# Altium PCB dc_cdi_cx500.PcbDoc (part 1 of 2)
Units mm, origin at the board's own origin, x right, y up, seen from the top; angles counter-clockwise.
Board outline 71.5 x 104.26 mm, 4 copper layers (Top, Power Plane, Ground Plane, Bottom), stack 1.586 mm thick; 134 components, 88 nets, 414 pads, 279 vias.
Unrouted connection lines stored in the file: 58.
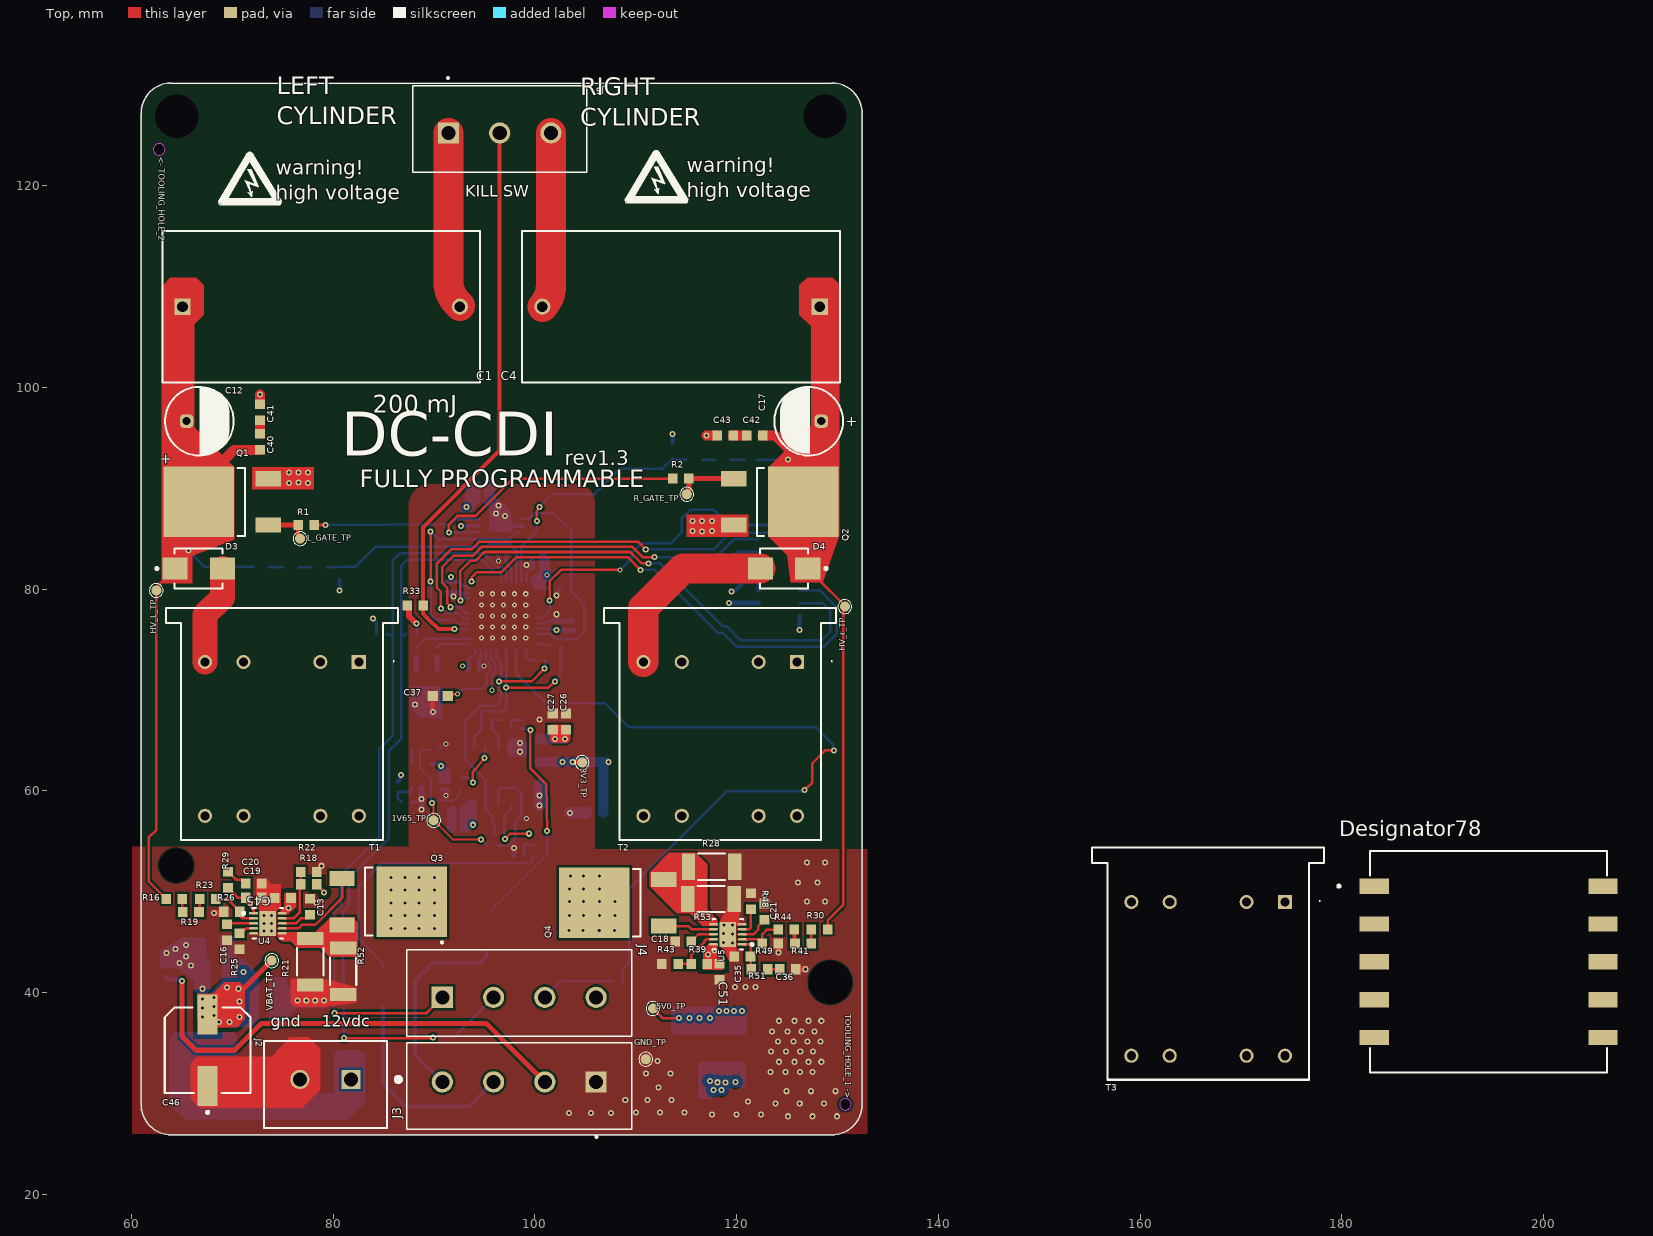
[diagram p0: Top view]
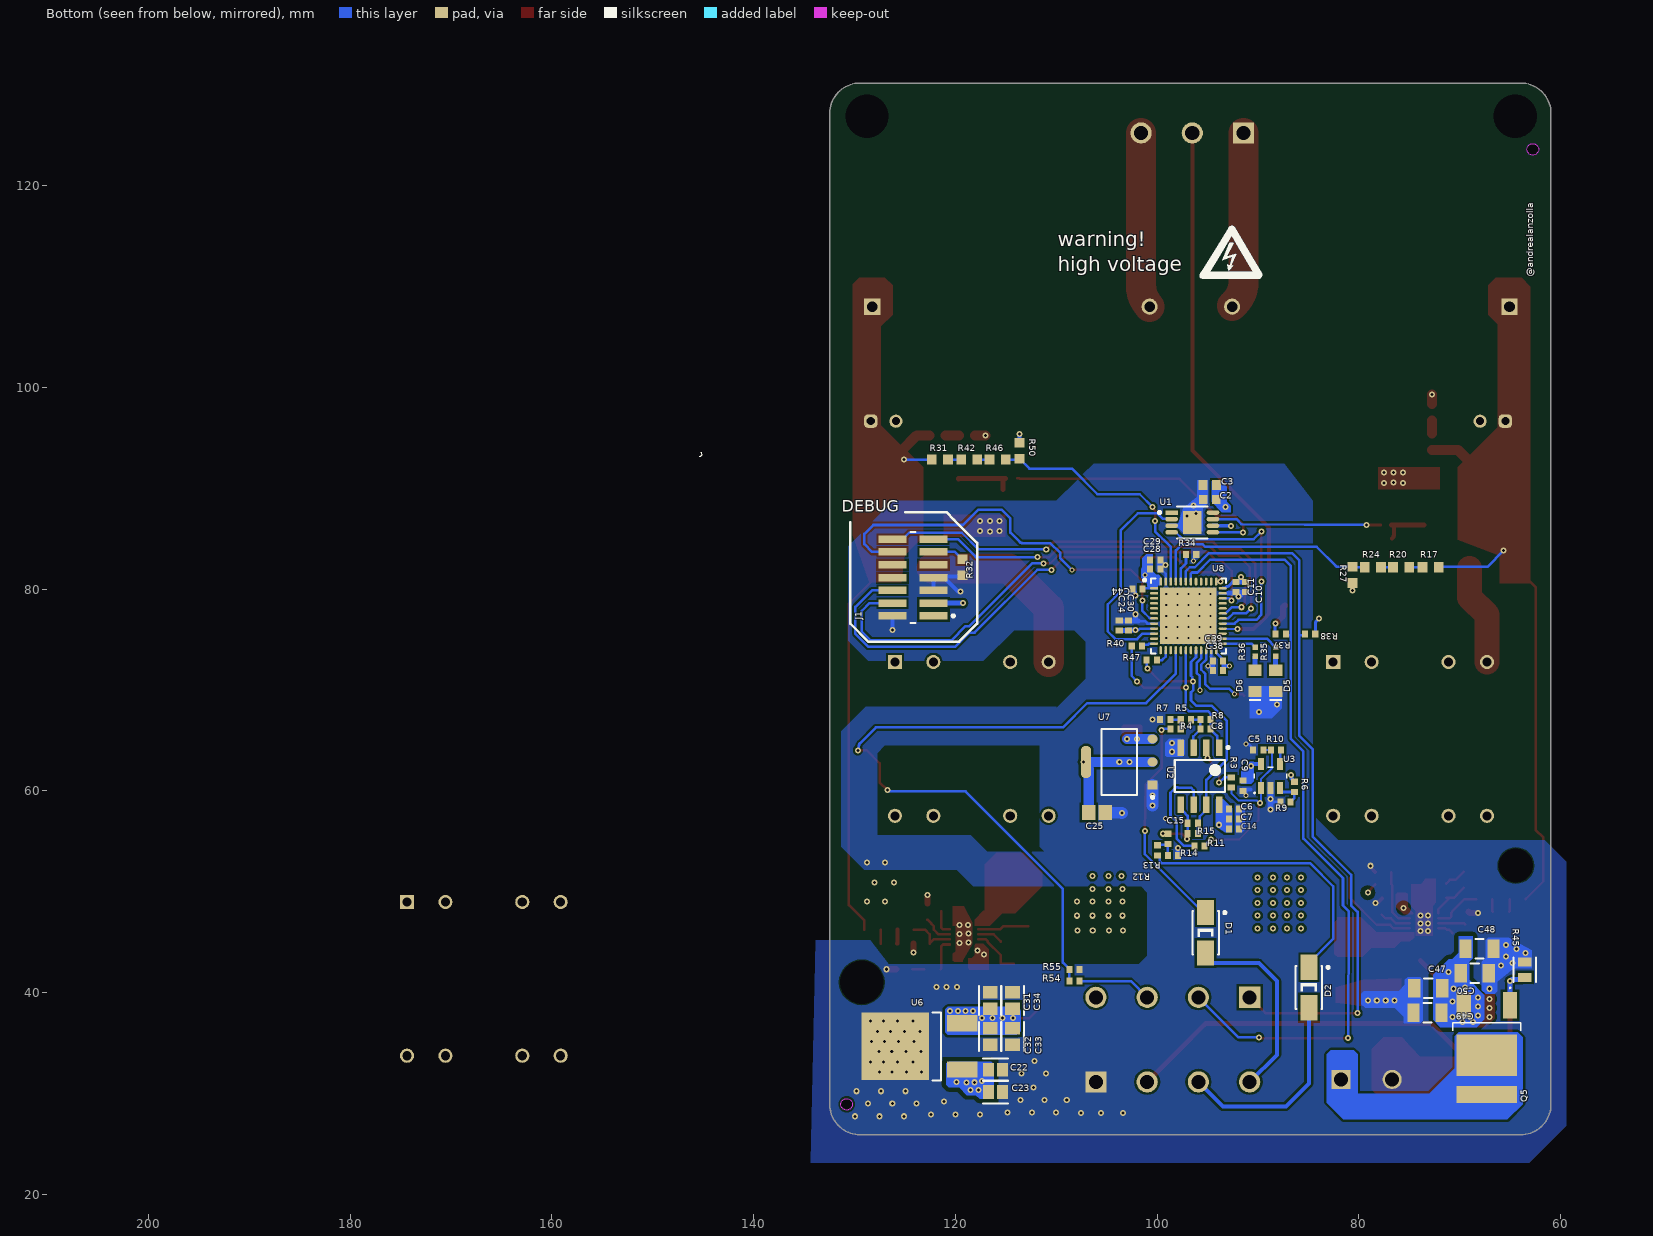
[diagram p1: Bottom view, seen from below]
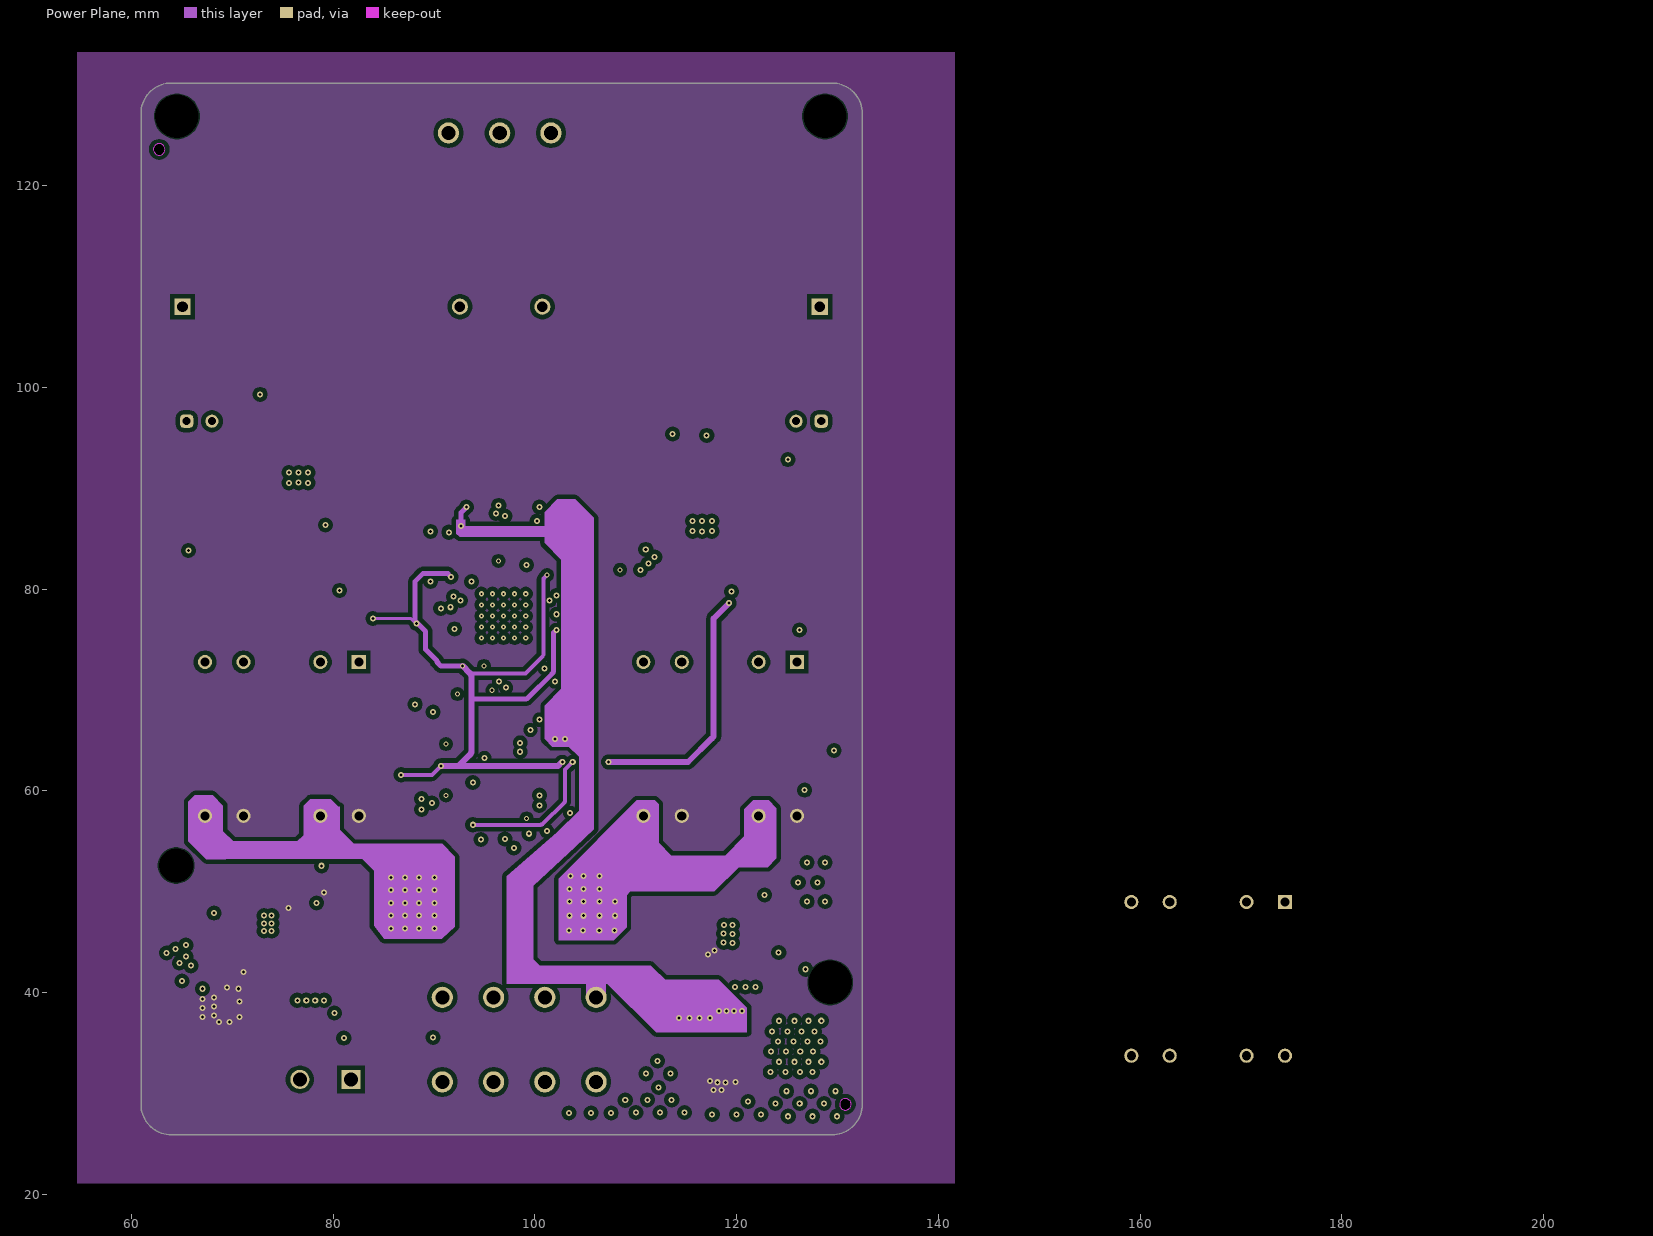
[diagram p2: Power Plane]
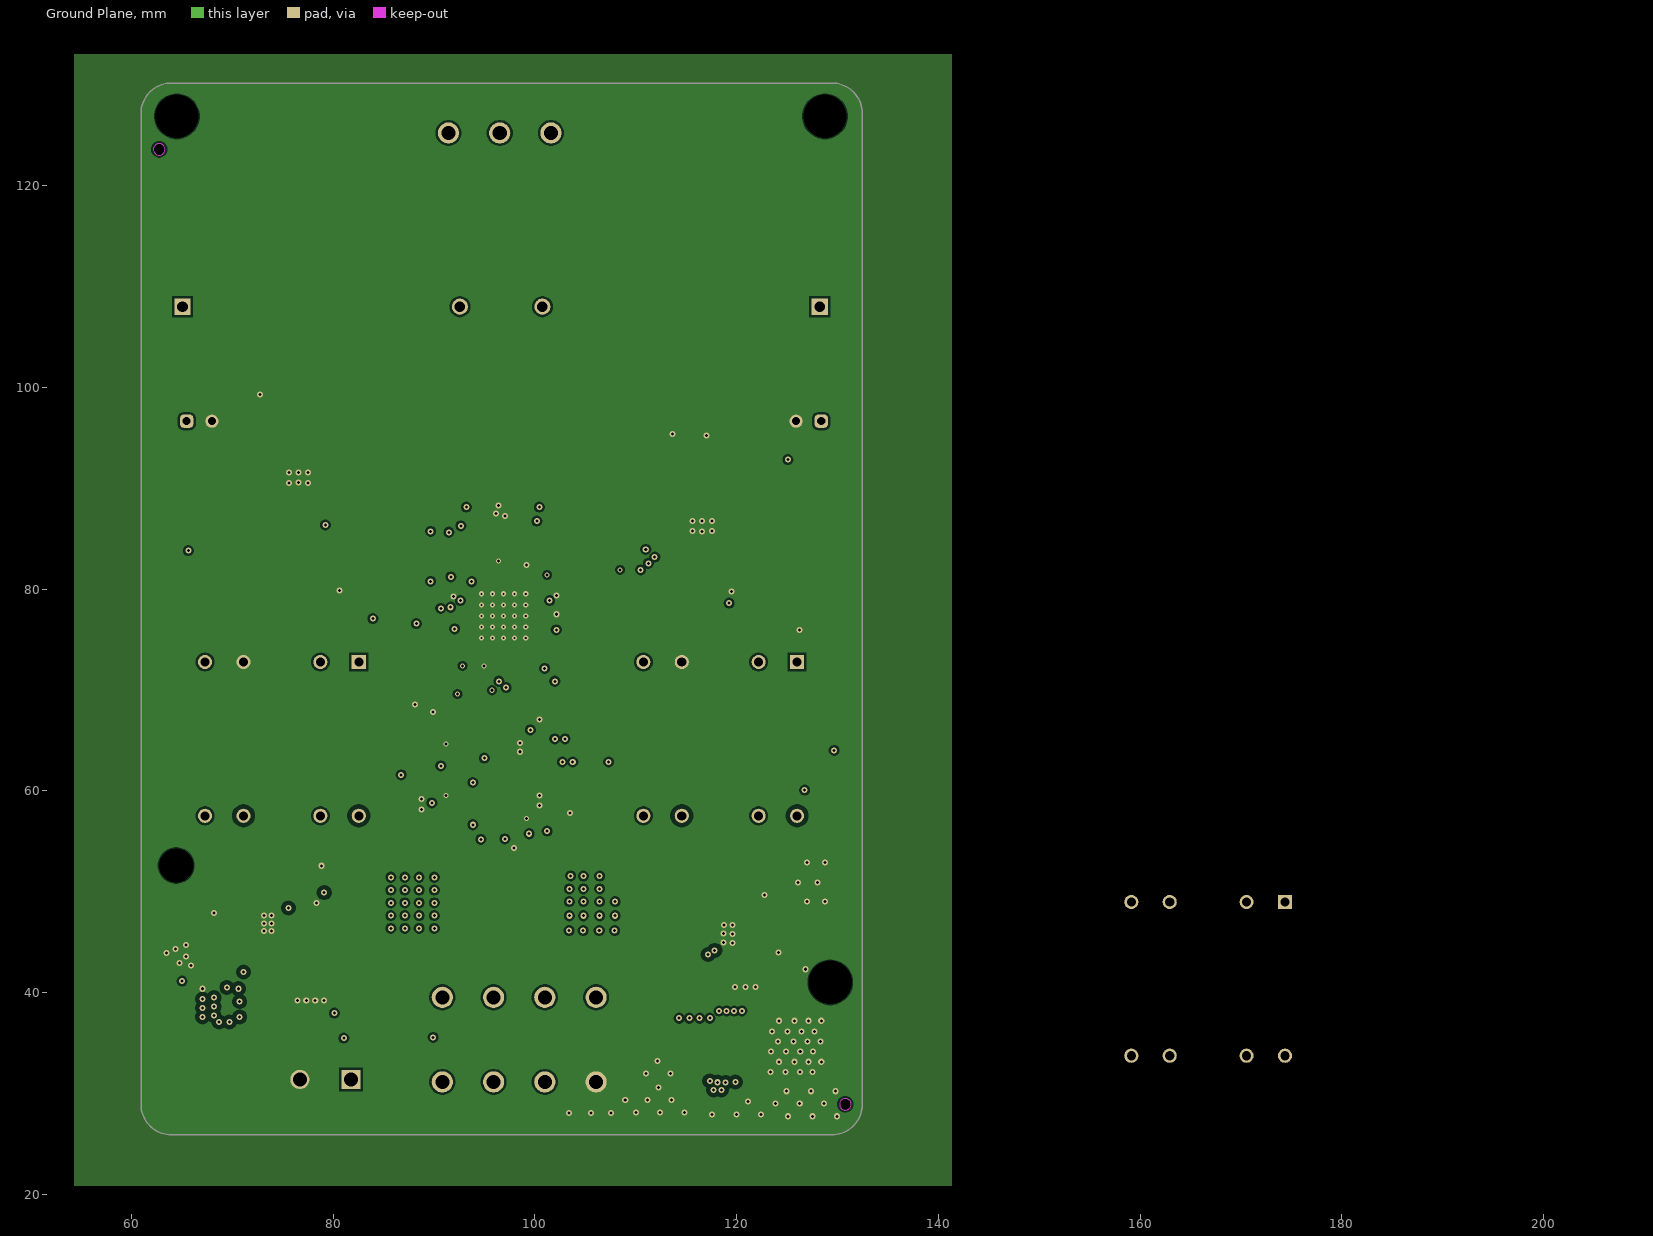
[diagram p3: Ground Plane]

## Layer stack, top to bottom
Top Solder: solder mask 0.0102, Solder Resist, Dk 3.5
Top: signal copper 0.035
Dielectric 2: prepreg 0.2104, PP-006, Dk 4.4
Power Plane: signal copper 0.0152
Dielectric 1: dielectric 1.065, FR-4, Dk 4.6
Ground Plane: signal copper 0.0152
Dielectric 3: prepreg 0.2104, PP-006, Dk 4.4
Bottom: signal copper 0.035
Bottom Solder: solder mask 0.0102, Solder Resist, Dk 3.5

## Board outline
60.96,28.908 60.96,127.17 cw(c63.96,127.17) 63.96,130.17 129.46,130.17 cw(c129.46,127.17) 132.46,127.17 132.46,28.908 cw(c129.46,28.908) 129.46,25.908 63.96,25.908 cw(c63.96,28.908)
cut-out: 63.34,123.597 ccw(c62.764,123.597) 62.764,124.173 ccw(c62.764,123.597) 62.188,123.597 ccw(c62.764,123.597) 62.764,123.021 ccw(c62.764,123.597)
cut-out: 130.208,28.93 ccw(c130.784,28.93) 130.784,28.354 ccw(c130.784,28.93) 131.36,28.93 ccw(c130.784,28.93) 130.784,29.506 ccw(c130.784,28.93)

## Design rules (kind name [scope] priority, off if disabled: settings)
AssemblyTestpoint [All] p1 off: testpointundercomponent=TRUE minsize=1.016 maxsize=2.54 preferedsize=1.524 minholesize=0 maxholesize=1.016 preferedholesize=0.813 testpointgrid=0.025 usegrid=TRUE gridtolerance=0 allowsidetop=TRUE allowsidebottom=TRUE
Clearance [Not (InNamedPolygon('VBAT_POUR') and InNamedPolygon('BOTTOM_GNDPLANE') and InNamedPolygon('TOP_GNDPLANE') and InNamedPolygon('GNDPLANE'))] p1: gap=0.1 ignorepadtopadclearanceinfootprint=FALSE except(0.15: Arc-Arc Arc-Track Track-Track)
Clearance Clearance_1 [InNamedPolygon('VBAT_POUR')] p2: gap=0.3 ignorepadtopadclearanceinfootprint=FALSE
Clearance Clearance_2 [InNamedPolygon('GNDPLANE')] p3: gap=0.3 ignorepadtopadclearanceinfootprint=FALSE
Clearance Clearance_3 [InNamedPolygon('TOP_GNDPLANE')] p4: gap=1 ignorepadtopadclearanceinfootprint=FALSE
Clearance Clearance_4 [InNamedPolygon('BOTTOM_GNDPLANE')] p5: gap=1 ignorepadtopadclearanceinfootprint=FALSE
ComponentClearance [All] p1: gap=0.1 collisioncheckmode=3 verticalgap=0.254 showdistances=FALSE
Creepage [InNet('VBAT')] p1: checkdistance=0.4 ignoreinternallayers=FALSE applytopolygonpour=TRUE
Creepage Creepage_1 [InNet('GND')] p2: checkdistance=0.2 ignoreinternallayers=FALSE applytopolygonpour=TRUE
FabricationTestpoint [All] p1 off: side=3 testpointundercomponent=TRUE minsize=1.016 maxsize=2.54 preferedsize=1.524 minholesize=0 maxholesize=1.016 preferedholesize=0.813 testpointgrid=0.025 allowsidetop=TRUE allowsidebottom=TRUE usegrid=TRUE gridtolerance=0
HoleToHoleClearance [All] p1 off: gap=0.254 allowstackedmicrovias=TRUE
NetAntennae [All] p1 off: netantennaetolerance=0
PlaneClearance [All] p1: clearance=0.2
PlaneConnect [All] p1: planeconnectstyle=Direct reliefexpansion=0.508 reliefentries=4 reliefconductorwidth=0.254 reliefairgap=0.254
PolygonConnect [All] p1: connectstyle=Direct reliefconductorwidth=0.254 reliefentries=4 polygonreliefangle="90 Angle" airgapwidth=0.254
RoutingVias [Not InNet('GND')] p1: holewidth=0.3 width=0.45 viastyle="Through Hole" minholewidth=0.3 minwidth=0.45 maxholewidth=0.5 maxwidth=1
RoutingVias RoutingVias_stitch_mcu [InNet('GND')] p2: holewidth=0.3 width=0.5 viastyle="Through Hole" minholewidth=0.2 minwidth=0.4 maxholewidth=0.5 maxwidth=1
SilkToSilkClearance [All] p1 off: silktosilkclearance=0.254
SilkToSolderMaskClearance [IsPad] p1 off: minsilkscreentomaskgap=0.254 clearancetoexposedcopper=TRUE
SolderMaskExpansion [All] p1: expansion=0.102 istentingtop=FALSE
SupplyNets "Schematic Supply Nets_1" [InNet('VBAT_0')] p1: voltage=0.000
SupplyNets "Schematic Supply Nets_5" [InNet('GND')] p2: voltage=0.000
SupplyNets "Schematic Supply Nets_4" [InNet('5V0')] p3: voltage=0.000
SupplyNets "Schematic Supply Nets_2" [InNet('1V65')] p4: voltage=0.000
SupplyNets "Schematic Supply Nets" [InNet('3V3')] p5: voltage=0.000
Width [All] p1: maxlimit=5 minlimit=0.1 preferedwidth=0.254
21 further rules are at their usual default settings.

## Classes and differential pairs
component class LV_power: C22 C23 C25 C26 C27 C31 C32 C33 C34 U6 U7
component class logic: C10 C11 C24 C28 C29 C30 C37 C38 C39 C44 D5 D6 R33 R34 R35 R36 R37 R38 R40 R47 R54 R55 U8
component class input_signal_conditioning: C5 C6 C7 C8 C9 C14 C15 D1 D2 R3 R4 R5 R6 R7 R8 R9 R10 R11 R12 R13 R14 R15 U2 U3
component class input_output: C46 C47 C48 C49 C50 J1 J2 J3 J4 J6 Q5 R32 R45
component class HV_power: C12 C13 C16 C17 C18 C19 C20 C21 C35 C36 C40 C41 C42 C43 C45 C51 D3 D4 Q3 Q4 R16 R17 R18 R19 R20 R21 R22 R23 R24 R25 R26 R27 R28 R29 R30 R31 R39 R41 R42 R43 R44 R46 R48 R49 R50 R51 R52 R53 T1 T2 U4 U5
component class cd_switching: C1 C2 C3 C4 Q1 Q2 R1 R2 U1

## Components (designator, comment, footprint, x,y, rotation, side; value= is the part's Value field where it differs from the comment)
C1 "BFC233820225" FP-BFC233820225-MFG 78.825,108 r0 top
C2 "06035C104KAT4A" CAPC1608X90X35LL15T15 94.784,88.893 r0 bottom value=100nF
C3 "C0603C475K8PACTU" CAPC1608X87X35NL15T15 94.784,90.322 r180 bottom value=100nF
C4 "BFC233820225" FP-BFC233820225-MFG 114.5,108 r180 top
C5 "Capacitor_0402" 0402_fp 89.982,64.072 r0 bottom value="100 nF"
C6 "Capacitor_0402" 0402_fp 92.39,58.199 r180 bottom value="100 nF"
C7 "Capacitor_0402" 0402_fp 92.387,57.199 r180 bottom value="100 nF"
C8 "Capacitor_0402" 0402_fp 95.208,66.143 r180 bottom value="3.3 nF"
C9 "Capacitor_0402" 0402_fp 91.513,60.515 r270 bottom value="100 nF"
C10 "Capacitor_0402" 0402_fp 91.265,80.214 r270 bottom value="10 nF"
C11 "Capacitor_0402" 0402_fp 92.188,80.214 r270 bottom value="10 nF"
C12 "860021373001" WCAP-ATG5_D6.3H11 66.741,96.65 r180 top
C13 "GRM21BR61C475KA88L" 0603_FP 77.724,48.514 r270 top value="4.7 uF"
C14 "Capacitor_0402" 0402_fp 92.387,56.223 r180 bottom value="100 nF"
C15 "Capacitor_0402" 0402_fp 96.467,56.793 r180 bottom value="3.3 nF"
C16 "Capacitor_0603" 0603_FP 69.469,45.974 r90 top value=".1 uF"
C17 "860021373001" WCAP-ATG5_D6.3H11 127.147,96.65 r0 top
C18 "Capacitor_0603" 0603_FP 114.706,45.059 r0 top value="4.7 uF"
C19 "Capacitor_0603" 0603_FP 72.136,49.403 r180 top value="100 pF"
C20 "Capacitor_0603" 0603_FP 72.136,50.8 r180 top value="10 nF"
C21 "Capacitor_0603" 0603_FP 122.782,48.035 r90 top value=".1 uF"
C22 "CC0805MKX5R8BB226" FP-CC0805-0_2-1_45-IPC_C 116.027,32.359 r180 bottom
C23 "CC0805MKX5R8BB226" FP-CC0805-0_2-1_45-IPC_C 116.027,30.155 r180 bottom
C24 "Capacitor_0402" 0402_fp 103.759,76.398 r90 bottom value="10 nF"
C25 "0805ZG106ZAT2A" CAPC2013X152X50NL20T25 105.956,57.861 r0 bottom
C26 "Capacitor_0603" 0603_FP 103.09,66.876 r90 top value="100 nF"
C27 "Capacitor_0603" 0603_FP 101.777,66.876 r90 top value="100 nF"
C28 "Capacitor_0402" 0402_fp 100.193,82.011 r180 bottom value="10 nF"
C29 "Capacitor_0402" 0402_fp 100.193,82.911 r180 bottom value="10 nF"
C30 "Capacitor_0402" 0402_fp 102.851,76.398 r90 bottom value="10 nF"
C31 "GRM21BR61A476ME15K" FP-GRM21B-0_2-e0_2_0_7-IPC_B 116.552,39.222 r90 bottom
C32 "GRM21BR61A476ME15K" FP-GRM21B-0_2-e0_2_0_7-IPC_B 116.552,35.656 r270 bottom
C33 "GRM21BR61A476ME15K" FP-GRM21B-0_2-e0_2_0_7-IPC_B 114.342,35.656 r270 bottom
C34 "GRM21BR61A476ME15K" FP-GRM21B-0_2-e0_2_0_7-IPC_B 114.342,39.222 r90 bottom
C35 "Capacitor_0603" 0603_FP 120.585,43.578 r180 top value="100 pF"
C36 "Capacitor_0603" 0603_FP 125.068,42.32 r0 top value="10 nF"
C37 "0603ZD475MAT2A" CAPC1608X90X35NL15T15 90.628,69.42 r180 top
C38 "Capacitor_0402" 0402_fp 93.981,71.929 r0 bottom value="10 nF"
C39 "Capacitor_0402" 0402_fp 93.981,72.864 r0 bottom value="10 nF"
C40 "Capacitor_0603" 0603_FP 72.771,94.615 r90 top value="470 nF"
C41 "Capacitor_0603" 0603_FP 72.771,97.536 r90 top value="470 nF"
C42 "Capacitor_0603" 0603_FP 121.793,95.25 r180 top value="470 nF"
C43 "Capacitor_0603" 0603_FP 118.872,95.25 r180 top value="470 nF"
C44 "Capacitor_0402" 0402_fp 101.959,79.998 r0 bottom value="100 nF"
C45 "GRM21BR61C475KA88L" 0603_FP 75.028,49.368 r180 top value=".22 uF"
C46 "EEEFT1E471AP" FP-FTF-MFG 67.564,34.29 r90 top
C47 "C1206X104J3GACTU" FP-C1206X104J3GACTU-MFG 68.524,41.928 r180 bottom
C48 "C1206X104J3GACTU" FP-C1206X104J3GACTU-MFG 68.043,44.342 r180 bottom
C49 "C1206X104J3GACTU" FP-C1206X104J3GACTU-MFG 73.203,38.012 r0 bottom
C50 "C1206X104J3GACTU" FP-C1206X104J3GACTU-MFG 73.127,40.426 r0 bottom
C51 "GRM21BR61C475KA88L" 0603_FP 118.297,42.066 r270 top value=".22 uF"
D1 "S1M-13-F" DIOD-S1M-13-F-SMA-2_V 95.196,45.934 r90 bottom
D2 "S1M-13-F" DIOD-S1M-13-F-SMA-2_V 84.963,40.513 r90 bottom
D3 "S3JB" FP-403AF-MFG 66.675,82.042 r0 top
D4 "S3JB" FP-403AF-MFG 124.715,82.042 r180 top
D5 "150080RS75000" WL-SMCW_0805_150080xx75000 88.243,70.914 r90 bottom
D6 "150080GS75000" WL-SMCW_0805_150080xx75000 90.297,70.914 r90 bottom
Designator78 "Comment" "WE-FB 3751_EFD20" 194.564,43.053 r0 top
J1 "FTSH-107-01-F-DV-K" FP-FTSH-107-01-F-DV-K-MFG 124.206,81.153 r90 bottom
J2 "1755736" PHOE-1755736-2_V 79.248,31.392 r180 top
J3 "1755752" PHOENIX_1755752 109.611,35.017 r180 top
J4 "1755752" PHOENIX_1755752 87.291,35.667 r0 top
J6 "1755749" PHOENIX_1755749 87.9,121.352 r0 top
Q1 "IPB200N25N3" FP-PG-TO252-3-MFG 69,88.646 r90 top
Q2 "IPB200N25N3" FP-PG-TO252-3-MFG 124.294,88.646 r270 top
Q3 "IPD50R280CE" FP-PG-TO252-3-MFG 85.471,49.022 r270 top
Q4 "IPD50R280CE" FP-PG-TO252-3-MFG 108.201,48.909 r90 top
Q5 "MJD3055T4G" PRSS0004ZG-A_MFG 67.31,34.544 r0 bottom
R1 "Resistor_0603" 0603_FP 77.343,86.36 r0 top value="47 Ohm"
R2 "Resistor_0603" 0603_FP 114.468,90.984 r0 top value="47 Ohm"
R3 "Resistor_0402" 0402_fp 92.656,60.833 r270 bottom value="100 Ω"
R4 "Resistor_0402" 0402_fp 98.171,66.143 r0 bottom value="47 kΩ"
R5 "Resistor_0402" 0402_fp 97.155,67.056 r0 bottom value="10 kΩ"
R6 "Resistor_0402" 0402_fp 86.395,60.401 r270 bottom value="10 kΩ"
R7 "Resistor_0402" 0402_fp 99.196,67.061 r180 bottom value="8.2 kΩ"
R8 "Resistor_0402" 0402_fp 95.208,67.069 r0 bottom value="100 kΩ"
R9 "Resistor_0402" 0402_fp 87.285,58.889 r0 bottom value="10 kΩ"
R10 "Resistor_0402" 0402_fp 88.229,64.047 r180 bottom value="10 kΩ"
R11 "Resistor_0402" 0402_fp 95.807,54.558 r180 bottom value="100 Ω"
R12 "Resistor_0402" 0402_fp 99.949,54.102 r270 bottom value="47 kΩ"
R13 "Resistor_0402" 0402_fp 98.933,55.245 r270 bottom value="10 kΩ"
R14 "Resistor_0402" 0402_fp 98.425,53.594 r0 bottom value="8.2 kΩ"
R15 "Resistor_0402" 0402_fp 96.467,55.766 r0 bottom value="100 kΩ"
R16 "Resistor_0603" 0603_FP 64.262,49.276 r180 top value="50 kOhm"
R17 "Resistor_0603" 0603_FP 72.898,82.169 r180 bottom value="100 kOhm"
R18 "Resistor_0603" 0603_FP 77.597,50.743 r0 top value="470 kOhm"
R19 "Resistor_0603" 0603_FP 65.913,48.006 r180 top value="50 kOhm"
R20 "Resistor_0603" 0603_FP 75.819,82.169 r180 bottom value="100 kOhm"
R21 "CSRN2010FK20L0" FP-CSRN2010-IPC_B 77.728,43.058 r90 top
R22 "Resistor_0603" 0603_FP 77.597,51.943 r180 top value="56 kOhm"
R23 "Resistor_0603" 0603_FP 67.564,49.276 r180 top value="24 kOhm"
R24 "Resistor_0603" 0603_FP 78.613,82.169 r180 bottom value="165 kOhm"
R25 "Resistor_0603" 0603_FP 70.74,45.093 r90 top value="100 kOhm"
R26 "Resistor_0603" 0603_FP 69.956,48.02 r0 top value="1 kOhm"
R27 "Resistor_0603" 0603_FP 80.645,81.407 r90 bottom value="5.6 kOhm"
R28 "CSRN2010FK20L0" FP-CSRN2010-IPC_B 117.525,52.49 r180 top
R29 "Resistor_0603" 0603_FP 69.596,51.181 r270 top value="10 kOhm"
R30 "Resistor_0603" 0603_FP 128.223,46.257 r0 top value="50 kOhm"
R31 "Resistor_0603" 0603_FP 121.539,92.837 r0 bottom value="100 kOhm"
R32 "Resistor_0603" 0603_FP 119.316,82.183 r270 bottom value="10 kOhm"
R33 "Resistor_0603" 0603_FP 88.155,78.391 r180 top value="10 kOhm"
R34 "Resistor_0402" 0402_fp 96.633,83.427 r180 bottom value="10 kΩ"
R35 "MCS04020D5600BE100" RESC1005X37X20NL05T10 88.265,73.787 r270 bottom
R36 "MCS04020D5600BE100" RESC1005X37X20NL05T10 90.297,73.787 r270 bottom
R37 "Resistor_0402" 0402_fp 87.757,75.565 r180 bottom value="4.7 kΩ"
R38 "Resistor_0402" 0402_fp 84.836,75.565 r0 bottom value="4.7 kΩ"
R39 "Resistor_0603" 0603_FP 116.309,42.841 r180 top value="470 kΩ"
R40 "Resistor_0402" 0402_fp 102.013,74.376 r180 bottom value="0 Ω"
R41 "Resistor_0603" 0603_FP 126.592,44.86 r0 top value="50 kOhm"
R42 "Resistor_0603" 0603_FP 118.618,92.837 r0 bottom value="100 kOhm"
R43 "Resistor_0603" 0603_FP 113.402,42.852 r180 top value="56 kΩ"
R44 "Resistor_0603" 0603_FP 124.938,46.257 r0 top value="24 kOhm"
R45 "CRGP0805F10K" FP-CRGP0805-IPC_C 63.562,42.277 r270 bottom value=10KΩ
R46 "Resistor_0603" 0603_FP 115.824,92.837 r0 bottom value="165 kOhm"
R47 "Resistor_0402" 0402_fp 100.545,72.964 r180 bottom value="0 Ω"
R48 "Resistor_0603" 0603_FP 121.451,49.053 r90 top value="100 kΩ"
R49 "Resistor_0603" 0603_FP 123.346,44.866 r180 top value="1 kOhm"
R50 "Resistor_0603" 0603_FP 113.665,93.726 r270 bottom value="5.6 kOhm"
R51 "Resistor_0603" 0603_FP 122.274,42.32 r0 top value="10 kΩ"
R52 "CSRN2010FK20L0" FP-CSRN2010-IPC_B 80.995,42.119 r90 top
R53 "CSRN2010FK20L0" FP-CSRN2010-IPC_B 117.465,49.282 r180 top
R54 "Resistor_0402" 0402_fp 108.204,41.148 r0 bottom value="20 kΩ"
R55 "Resistor_0402" 0402_fp 108.204,42.291 r0 bottom value="39 kΩ"
T1 "74080" 74080 82.55,72.771 r270 top
T2 "74080" 74080 126,72.771 r270 top
T3 "74080" 74080 174.372,48.985 r270 top (schematic designator T2)
U1 "ADP3654ARHZ-RL" FP-RH-8-1-IPC_C 96.52,86.614 r180 bottom
U2 "LM358MX" D0008A_M 95.758,61.468 r270 bottom
U3 "ISL28134FHZ-T7A" P5_064A_MFG 88.773,61.468 r90 bottom
U4 "LT3758EDD#PBF" FP-DD-10-05-08-1699-IPC_B 73.537,46.868 r0 top
U5 "LT3758EDD#PBF" FP-DD-10-05-08-1699-IPC_B 119.134,45.778 r180 top
U6 "L78M05ABDT-TR" FP-L78M05ABDT-TR-MFG 124.526,34.671 r90 bottom
U7 "AMS1117-3.3" FP-AMS1117-IPC_C 103.759,62.865 r0 bottom
U8 "STM32F411CEU6" STM-UFQFPN48_L 96.901,77.343 r180 bottom

## Footprints (in the part's own frame and the unit in brackets; to place one, negate y for a bottom-side part, rotate by r counter-clockwise, add the part's x,y. Pads: shape width x height; smd on the part's side, far side on the other; paste and mask are expansions set on the pad)
0402_fp [mm]
  rect 0.6x0.7 smd mask+0.05: 1(-0.508,0) 2(0.508,0)
0603_FP [mm]
  rect 0.95x1 smd mask+0.05: 1(-0.8,0) 2(0.8,0)
74080 [mm]
  rect 1.4x1.4 hole 0.9: 1(0,0)
  round 1.4 hole 0.9: 2(0,-3.81) 4(0,-11.43) 5(0,-15.24) 6(15.24,-15.24) 7(15.24,-11.43) 9(15.24,-3.81) 10(15.24,0)
  silkscreen extent -5.38,-19.12 17.62,3.88, body extent -5.38,-19.12 17.62,3.88, height 18.1
CAPC1608X87X35NL15T15 [mm] "Chip Capacitor, 2-Leads, Body 1.60x0.80mm, IPC Medium Density"
  rect 0.9x1 smd: 1(-0.675,0) 2(0.675,0)
  body extent -0.87,-0.48 0.87,0.47, height 0.87
CAPC1608X90X35LL15T15 [mm] "Chip Capacitor, 2-Leads, Body 1.60x0.81mm, IPC High Density"
  rect 0.85x0.9 smd: 1(-0.65,0) 2(0.65,0)
  body extent -0.88,-0.48 0.87,0.48, height 0.9
CAPC1608X90X35NL15T15 [mm] "Chip Capacitor, 2-Leads, Body 1.60x0.81mm, IPC Medium Density"
  rect 1.05x1 smd: 1(-0.75,0) 2(0.75,0)
  body extent -0.88,-0.48 0.87,0.48, height 0.9
CAPC2013X152X50NL20T25 [mm] "Chip Capacitor, 2-Leads, Body 2.01x1.25mm, IPC Medium Density"
  rect 1.35x1.45 smd: 1(-0.825,0) 2(0.825,0)
  body extent -1.1,-0.72 1.11,0.72, height 1.52
D0008A_M [mm] "SOIC, 8-Leads, Body 5x4mm, Pitch 1.27mm, IPC Low Density"
  rrect15% 1.65x0.65 smd: 1(-2.825,1.905) 2(-2.825,0.635) 3(-2.825,-0.635) 4(-2.825,-1.905) 5(2.825,-1.905) 6(2.825,-0.635) 7(2.825,0.635) 8(2.825,1.905)
  silkscreen extent -2.95,-2.5 1.6,2.9, body extent -3,-2.45 3,2.45, height 1.63
DIOD-S1M-13-F-SMA-2_V [mm] "SMD, 2-Leads, Body 4.3x2.605mm, Height 2.3mm"
  rect 2.5x1.7 smd: 1(-2,0) 2(2,0)
  silkscreen extent -2.15,-2.03 2.15,1.3, body extent -2.15,-1.3 2.15,1.3, height 2.3
FP-403AF-MFG [mm]
  rect 2.5x2.2 smd paste+0 mask+0: 1(-2.35,0) 2(2.35,0)
  silkscreen extent -4.27,-1.98 2.38,1.98, body extent -3.7,-2.07 3.7,2.07, height 0.25
FP-AMS1117-IPC_C [mm]
  rect 1.004x0.872 smd paste+0 mask+0: 1(-3.295,2.29)
  rrect100% 1.004x0.872 smd paste+0 mask+0: 2(-3.295,0) 3(-3.295,-2.29)
  rrect87% 1.004x3.182 smd paste+0 mask+0: 4(3.295,0)
  silkscreen extent -3.42,-3.25 1.75,3.62, body extent -3.53,-3.25 3.53,3.25, height 1.8
FP-BFC233820225-MFG [mm]
  rect 1.6x1.6 hole 1.05 paste-2539.97 mask+0: 1(-13.75,0)
  round 1.6 hole 1.05 paste-2539.97 mask+0: 2(13.75,0)
  silkscreen extent -15.75,-7.5 15.75,7.5, body extent -15.85,-7.6 15.85,7.6, height 0.25
FP-C1206X104J3GACTU-MFG [mm]
  rect 1.22x1.86 smd paste+0 mask+0: 1(-1.39,0) 2(1.39,0)
  silkscreen extent -0.4,-0.98 0.41,0.97, body extent -1.65,-0.8 1.65,0.8, height 1.8
FP-CC0805-0_2-1_45-IPC_C [mm]
  rect 1.105x1.356 smd paste+0 mask+0: 1(-0.701,0) 2(0.701,0)
  silkscreen extent -1.25,-1.13 1.25,1.13, body extent -1,-0.63 1,0.63, height 1.45
FP-CRGP0805-IPC_C [mm]
  rect 0.906x1.31 smd paste+0 mask+0: 1(-0.776,0) 2(0.776,0)
  silkscreen extent -1.23,-1.1 1.23,1.1, body extent -1,-0.63 1,0.63, height 0.65
FP-CSRN2010-IPC_B [mm]
  rect 1.305x2.608 smd paste+0 mask+0: 1(-2.301,0) 2(2.301,0)
  silkscreen extent -1.35,-1.3 1.35,1.3, body extent -3.2,-1.55 3.2,1.55, height 0.25
FP-DD-10-05-08-1699-IPC_B [mm]
  rect 0.881x0.242 smd paste+0 mask+0: 1(-1.416,1)
  rrect100% 0.881x0.242 smd paste+0 mask+0: 2(-1.416,0.5) 3(-1.416,0) 4(-1.416,-0.5) 5(-1.416,-1) 6(1.416,-1) 7(1.416,-0.5) 8(1.416,0) 9(1.416,0.5) 10(1.416,1)
  rect 1.65x2.48 smd paste-1000 mask+0: 11(0,0)
  silkscreen extent -2.53,-1.5 1.5,1.5, body extent -2.11,-1.75 2.11,1.75, height 0.25
FP-FTF-MFG [mm]
  rect 4x2 smd paste+0 mask+0: 1(-3.55,0) 2(3.55,0)
  silkscreen extent -6.27,-4.25 4.25,4.25, body extent -5.8,-4.5 5.8,4.5, height 0.25
FP-FTSH-107-01-F-DV-K-MFG [mm]
  rect 0.74x2.79 smd paste+0 mask+0: 1(-3.81,-2.035) 2(-3.81,2.035) 3(-2.54,-2.035) 4(-2.54,2.035) 5(-1.27,-2.035) 6(-1.27,2.035) 7(0,-2.035) 8(0,2.035) 9(1.27,-2.035) 10(1.27,2.035) 11(2.54,-2.035) 12(2.54,2.035) 13(3.81,-2.035) 14(3.81,2.035)
  silkscreen extent -4.51,-4.11 4.51,0.27, body extent -4.44,-2.92 4.44,2.92, height 6.38
FP-GRM21B-0_2-e0_2_0_7-IPC_B [mm]
  rect 1.255x1.456 smd paste+0 mask+0: 1(-0.826,0) 2(0.826,0)
  silkscreen extent -1.45,-1.13 1.45,1.13, body extent -1,-0.63 1,0.63, height 1.45
FP-L78M05ABDT-TR-MFG [mm]
  rect 1.6x3 smd paste+0 mask+0: 1(-2.3,-5.193) 3(2.3,-5.193)
  rect 6.7x6.7 smd paste+0 mask+0: 4(0,1.458)
  silkscreen extent -3.36,-3.11 3.36,-2.27, body extent -3.1,-3.3 3.1,3.3, height 2.4
FP-PG-TO252-3-MFG [mm]
  rect 1.5x2.5 smd paste+0 mask+0: 1(-2.3,-4.575) 3(2.3,-4.575)
  rect 7x7 smd paste+0 mask+0: 4(0,2.325)
  silkscreen extent -3.36,-2.28 3.36,-1.55, body extent -3.6,-5.92 3.6,5.92, height 0.25
FP-RH-8-1-IPC_C [mm]
  rect 1.257x0.436 smd paste+0 mask+0: 1(-2.051,0.975)
  rrect100% 1.257x0.436 smd paste+0 mask+0: 2(-2.051,0.325) 3(-2.051,-0.325) 4(-2.051,-0.975) 5(2.051,-0.975) 6(2.051,-0.325) 7(2.051,0.325) 8(2.051,0.975)
  rect 1.83x2.26 smd paste-1000 mask+0: 9(0,0)
  silkscreen extent -3.38,-1.6 1.5,1.6, body extent -2.46,-1.5 2.46,1.5, height 1.1
P5_064A_MFG [mm] "Recommended Land Pattern"
  rect 1.2x0.6 smd paste+0 mask+0: 1(-1.2,0.95) 2(-1.2,0) 3(-1.2,-0.95) 4(1.2,-0.95) 5(1.2,0.95)
  silkscreen extent -1.74,-1.6 0.87,1.64, body extent -1.4,-1.45 1.4,1.45, height 1.45
PHOE-1755736-2_V [mm] "THD, 2-Leads, Body 12.16x8.6mm, Pitch 5.08mm"
  rect 1.9x1.9 hole 1.4: 1(-2.54,0)
  round 1.9 hole 1.4: 2(2.54,0)
  silkscreen extent -7.42,-3.8 6.08,4.8, body extent -6.08,-3.8 6.08,4.8, height 12
PHOENIX_1755749 [mm]
  rect 2.1x2.1 / inner round 2.1 / far side rect 2.1x2.1 hole 1.4: 1(3.54,3.87)
  round 2.1 hole 1.4: 2(8.62,3.87) 3(13.7,3.87)
  silkscreen extent 0,0 17.24,9.42, body extent 0.02,0 17.26,8.57, height 12.15
PHOENIX_1755752 [mm]
  rect 2.1x2.1 / inner round 2.1 / far side rect 2.1x2.1 hole 1.4: 1(3.54,3.87)
  round 2.1 hole 1.4: 2(8.62,3.87) 3(13.7,3.87) 4(18.78,3.87)
  silkscreen extent 0,0 22.32,9.42, body extent 0.03,0 22.35,8.57, height 12.15
PRSS0004ZG-A_MFG [mm] "Recommended Land Pattern"
  rect 1.4x2.6 smd paste+0 mask+0: 1(-2.3,-4.2) 3(2.3,-4.2)
  rect 6x4.1 smd paste+0 mask+0: 4(0,0.75)
  rect 6x1.7 smd paste+0 mask+0: 4(0,4.65)
  silkscreen extent -3.37,-5.99 3.37,-1.67, body extent -3.3,-5.2 3.3,5.2, height 2.5
RESC1005X37X20NL05T10 [mm] "Chip Resistor, 2-Leads, Body 1.00x0.50mm, IPC Medium Density"
  rect 0.55x0.55 smd: 1(-0.45,0) 2(0.45,0)
  body extent -0.53,-0.27 0.53,0.28, height 0.37
STM-UFQFPN48_L [mm] "QFN, 48-Leads, Body 7.1x7.1mm, Pitch 0.5mm, Thermal Pad 5.6x5.6mm, IPC High Density"
  oval 0.8x0.25 smd: 1(-3.4,2.75) 2(-3.4,2.25) 3(-3.4,1.75) 4(-3.4,1.25) 5(-3.4,0.75) 6(-3.4,0.25) 7(-3.4,-0.25) 8(-3.4,-0.75) 9(-3.4,-1.25) 10(-3.4,-1.75) 11(-3.4,-2.25) 12(-3.4,-2.75) 25(3.4,-2.75) 26(3.4,-2.25) 27(3.4,-1.75) 28(3.4,-1.25) 29(3.4,-0.75) 30(3.4,-0.25) 31(3.4,0.25) 32(3.4,0.75) 33(3.4,1.25) 34(3.4,1.75) 35(3.4,2.25) 36(3.4,2.75)
  oval 0.25x0.8 smd: 13(-2.75,-3.4) 14(-2.25,-3.4) 15(-1.75,-3.4) 16(-1.25,-3.4) 17(-0.75,-3.4) 18(-0.25,-3.4) 19(0.25,-3.4) 20(0.75,-3.4) 21(1.25,-3.4) 22(1.75,-3.4) 23(2.25,-3.4) 24(2.75,-3.4) 37(2.75,3.4) 38(2.25,3.4) 39(1.75,3.4) 40(1.25,3.4) 41(0.75,3.4) 42(0.25,3.4) 43(-0.25,3.4) 44(-0.75,3.4) 45(-1.25,3.4) 46(-1.75,3.4) 47(-2.25,3.4) 48(-2.75,3.4)
  rect 5.6x5.6 smd: 49(0,0)
  silkscreen extent -4.48,-3.7 3.7,3.7, body extent -3.55,-3.55 3.55,3.55, height 0.6
WCAP-ATG5_D6.3H11 [mm] "Aluminum Electrolytic Capacitors, 6.3x11mm"
  rrect50% 1.3x1.3 hole 0.8: 1(1.25,0)
  round 1.3 hole 0.8: 2(-1.25,0)
  silkscreen extent -3.4,-3.4 3.4,3.4, body extent -3.14,-3.15 3.15,3.15, height 11.31
"WE-FB 3751_EFD20" [mm] "Flyback Transformer for LT3751, size EE35/18/10"
  rect 2.92x1.52 smd: 1(-11.33,7.5) 2(-11.33,3.75) 3(-11.33,0) 4(-11.33,-3.75) 5(-11.33,-7.5) 6(11.33,-7.5) 7(11.33,-3.75) 8(11.33,0) 9(11.33,3.75) 10(11.33,7.5)
  silkscreen extent -14.97,-10.98 11.75,10.98, body extent -13.75,-10.75 13.75,10.75, height 10.23
WL-SMCW_0805_150080xx75000 [mm] "SMD Mono-color Chip LED, body 2.0x1.25mm"
  rect 1.1x1.3 smd: 1(-1.05,0) 2(1.05,0)
  silkscreen extent -2,-0.6 -1.8,0.6, body extent -1,-0.63 1,0.62, height 0.7

## Part data
C1 C4: library part CMP-00030-39758189-1, "BFC233820225 Film Capacitor, Polypropylene, 800V, 20% +Tol, 20% -Tol, 0.22uF, Through Hole Mount", Capacitance=2.2µF, Case/Package=Radial, Dielectric=PP, Insulation Resistance=11GΩ, Max Operating Temperature=110°C, Min Operating Temperature=-55°C, Tolerance=20%, Voltage Rating=630V, Voltage Rating (AC)=400V, Contact Plating=Tin, Depth=15mm, Diameter=18mm, Dielectric Material=PP, Height=28mm, Height - Seated (Max)=24.9936mm, Lead Diameter=800µm, Lead Free="Lead Free", Lead Pitch=27.5mm, Length=31.5mm, Mount="Through Hole", NexarPartId=39758189, Number of Pins=2, Packaging=Bulk, Radiation Hardening=No, REACH SVHC=Unknown, RoHS=Compliant, Schedule B="8532250020, 8532250020", Termination=Radial, Voltage Rating (DC)=630V, Width=15.0114mm
C2: library part CMP-2006-04390-1, Manufacturer="AVX Interconnect / Elco", Part Number=06035C104KAT4A
C3: library part CMP-2006-03238-1, Manufacturer=Kemet, Part Number=C0603C475K8PACTU
C5 C6 C7 C8 C9 C10 C11 C14 C15 C16 C18 C19 C20 C21 C24 C26 C27 C28 C29 C30 C35 C36 C38 C39 C40 C41 C42 C43 C44 R1 R2 R3 R4 R5 R6 R7 R8 R9 R10 R11 R12 R13 R14 R15 R16 R17 R18 R19 R20 R22 R23 R24 R25 R26 R27 R29 R30 R31 R32 R33 R34 R37 R38 R39 R40 R41 R42 R43 R44 R46 R47 R48 R49 R50 R51 R54 R55: Package=0402
  C5 C6 C7 C8 C9 C10 C11 C14 C15 C16 C18 C19 C20 C21 C24 C26 C27 C28 C29 C30 C35 C36 C38 C39 C40 C41 C42 C43 C44 R1 R2 R16 R17 R18 R19 R20 R22 R23 R24 R25 R26 R27 R29 R30 R31 R32 R33 R39 R41 R42 R43 R44 R46 R48 R49 R50 R51: Format=0402
C12 C17: library part CMP-03913-53914267-1, "860021373001 WCAP-ATG5 Aluminum Electrolytic Capacitors", Capacitance=470nF, Case/Package=Radial, Leakage Current=5.64µA, Max Operating Temperature=105°C, Min Operating Temperature=-25°C, Ripple Current=14mA, Tolerance=20%, Voltage Rating=400V, Diameter=6.3mm, Height=11mm, Height - Seated (Max)=12.4968mm, Lead Pitch=2.4892mm, Length=11mm, Life (Hours)=2000hours, Mount="Through Hole", NexarPartId=53914267, Packaging="Tape & Box (TB)", Pitch=2.5mm, Polarity=Polar, REACH SVHC=Unknown, RoHS=Compliant, Voltage Rating (DC)=400V
C13 C45 C51: library part Capacitor_0603, Package=0402, Format=0402
C22 C23: library part CMP-03422-001497-1, "CAP CER 22UF 25V X5R 0805", Capacitance=22uF, Case Code (Imperial)=0805, Case Code (Metric)=2012, Dielectric=X5R, Max Operating Temperature=85°C, Min Operating Temperature=-55°C, Package Quantity=3000, Tolerance=20%, Voltage Rating=25V, Case/Package=0805, Halogen Free="Halogen Free", Height=1.25mm, Lead Free="Lead Free", Length=0.079inch, Mount="Surface Mount", Packaging="Tape and Reel", RoHS Compliant=Yes, Termination=SMD/SMT, Thickness=0.057inch, Voltage Rating (DC)=25V, Weight=0.000194oz, Width=0.049inch
C25: library part CMP-2007-04523-1, Manufacturer="AVX Interconnect / Elco", Part Number=0805ZG106ZAT2A
C31 C32 C33 C34: library part CMP-06035-042633-1, "Chip Multilayer Ceramic Capacitors for General Purpose, 0805, 47uF, X5R, 15%, 20%, 10V", Capacitance=47uF, Case Code (Imperial)=0805, Case Code (Metric)=2012, Dielectric=X5R, Max Operating Temperature=85°C, Min Operating Temperature=-55°C, Package Quantity=10000, Tolerance=20%, Voltage Rating=10V, Case/Package=0805, Length=0.079inch, Mount="Surface Mount", Packaging="Tape and Reel", Termination=SMD/SMT, Thickness=0.057inch, Voltage Rating (DC)=10V, Weight=0.000335oz, Width=0.049inch
C37: library part CMP-1035-02787-2, Manufacturer="AVX Interconnect / Elco", Part Number=0603ZD475MAT2A
C46: library part CMP-05427-000040-1, "CAP ALUM 470UF 20% 25V SMD", Capacitance=470uF, Case/Package=Radial, Dielectric Material=Aluminium, ESR (Equivalent Series Resistance)=80mR, Leakage Current=117.5uA, Max Operating Temperature=105°C, Min Operating Temperature=-55°C, Package Quantity=500, Ripple Current=850mA, Tolerance=20%, Voltage=25V, Construction=Cylindrical, Contact Plating=Tin, Diameter=8mm, Features="General Purpose", Height=10.2mm, Height - Seated (Max)=0.413inch, Lead Diameter=0.9mm, Lead Free="Lead Free", Lead Pitch=3.1mm, Length=10.2mm, Life (Hours)=2000Hour, Mount="Surface Mount", Number of Pins=2, Packaging="Tape and Reel", Radiation Hardening=No, REACH SVHC="No SVHC", Ripple Current (AC)=850mA, RoHS Compliant=Yes, Series=FT, Termination=SMD/SMT, Voltage Rating=25V, Voltage Rating (DC)=25V
C47 C48 C49 C50: library part CMP-03020-034648-1, "CAP CER 0.1UF 25V C0G/NP0 1206", RoHS Compliant=Yes
D1 D2: library part CMP-0639-00001-1, "Surface Mount Glass Passivated Rectifier, 1000V, 1 A, -65 to 125 degC, 2-Pin SMA Package, RoHS, Tape and Reel", Forward Voltage Drop VF (V)=1.1, Manufacturer="Diodes Inc", Maximum Average Rectified Current IO (A)=1, Maximum Peak Forward Surge Current IFSM (A)=30, Maximum Reverse Current IR (uA)=5, Operating Temperature Range="-65 to 150 degC", Peak Repetitive Reverse Voltage VRRM (V)=1000, Total Capacitance CT (pF)=10, ComponentLink1Description="Manufacturer URL", ComponentLink1URL=http://www.diodes.com/, ComponentLink2Description=Datasheet, ComponentLink2URL=http://diodes.com/datasheets/ds16003.pdf, ComponentLink3Description="Package Specification", ComponentLink3URL=http://diodes.com/datasheets/ds16003.pdf, DatasheetVersion="Rev. 22 - 2", Mounting Technology="Surface Mount", PackageDescription="2-Pin SMD, Body 4.3 x 2.605 mm, Height 2.3 mm", PackageReference=S1M-13-F-SMA-2, PackageVersion="Rev. 22 - 2", Packing="Tape and Reel", PartNumber=S1M-13-F, RoHS=TRUE
D3 D4: library part CMP-00278-84331306-1, "S3JB Rectifier Diode, 1 Phase, 1 Element, 3A, 600V V(RRM), Silicon, DO-214AA", Average Rectified Current=3A, Capacitance=40pF, Case/Package=SMB, Manufacturer Lifecycle Status=ACTIVE, Max Forward Surge Current (Ifsm)=80A, Max Junction Temperature (Tj)=150°C, Max Repetitive Reverse Voltage (Vrrm)=600V, Min Operating Temperature=-55°C, Peak Reverse Current=10µA, Element Configuration=Single, Forward Current=3A, Height=2.65mm, Lifecycle Status=Production, Max Operating Temperature=150°C, Max Reverse Voltage (DC)=600V, Mount="Surface Mount", NexarPartId=84331306, Packaging="Cut Tape", Reverse Recovery Time=1.5µs, Reverse Voltage=600V, RoHS=Compliant, Schedule B="8541100080, 8541100080", Weight=180mg
D5: library part CMP-1426-00011-3, "LED Uni-Color Red 630nm 2-Pin Chip 0805(2012Metric) T/R", Case Code (Imperial)=0805, Case Code (Metric)=2012, Color=Red, Forward Current=100mA, Forward Voltage=2V, Max Junction Temperature (Tj)=95°C, Max Operating Temperature=85°C, Max Reverse Voltage (DC)=5V, Min Operating Temperature=-40°C, Power Dissipation=72mW, Test Current=20mA, Case/Package=0805, Dominant Wavelength=625nm, Height=700µm, Length=2mm, Lens Style="Clear, Rectangular", Luminous Intensity=150mcd, Mount="Surface Mount", Packaging="Tape and Reel", Peak Wavelength=630nm, REACH SVHC=Unknown, RoHS=Compliant, Viewing Angle=140°, Wavelength=625nm, Width=1.25mm
D6: library part CMP-1426-00007-3, "WURTH ELEKTRONIK - 150080GS75000 - LED, Green, SMD, 0805, 30 mA, 3.2 V, 520 nm", Case Code (Imperial)=0805, Case Code (Metric)=2012, Color=Green, Forward Current=100mA, Forward Voltage=3.2V, Max Junction Temperature (Tj)=95°C, Max Operating Temperature=85°C, Max Reverse Voltage (DC)=5V, Min Operating Temperature=-40°C, Power Dissipation=105mW, Test Current=20mA, Case/Package=0805, Dominant Wavelength=525nm, Height=700µm, Length=2mm, Lens Style="Clear, Rectangular", Luminous Intensity=450mcd, Mount="Surface Mount", Packaging="Tape and Reel", Peak Wavelength=515nm, REACH SVHC=Unknown, Reverse Voltage=5V, RoHS=Compliant, Viewing Angle=140°, Wavelength=525nm, Width=1.25mm
J1: library part CMP-02766-001448-1, "CONN HEADER SMD 14POS 1.27MM", Color=Black, Max Operating Temperature=125°C, Min Operating Temperature=-55°C, Package Quantity=1, Connector Type="Male Pin", Contact Material=Bronze, Contact Mating Length=0.12inch, Contact Plating=Gold, Contact Type="Male Pin", Depth=5.84mm, Gender=Male, Housing Color=Black, Housing Material=Polymer, Lead Free="Lead Free", Length=8.89mm, Mount="Surface Mount", Number of Contacts=14, Number of Positions=14, Number of Rows=2, Orientation=Straight, Packaging=Rail/Tube, Pitch=1.27mm, Radiation Hardening=No, RoHS Compliant=Yes, Row Spacing=0.05inch, Series=FTSH, Termination=Solder
J2: library part CMP-2000-05300-1, "Male Header, Pitch 5.08 mm, 1 x 2 Postion, Height 12 mm, Tail Length 3.9 mm, RoHS, Bulk", Colour=Green, Manufacturer="Phoenix Contact", Content=250pc(s), Datasheet URL=http://www.mouser.com/ds/2/324/ItemDetail_1755736-921028.pdf, Datasheet Version=Apr-16, Industrial packaging=Yes, Manufacturer part No.=1755736, Manufacturer URL=http://www.phoenixcontact.com/, Number of Contacts=2, Pitch=5.08mm, Type=MSTBVA2,5/2-G-5,08
J3 J4 J6: Package=None, Availability=Unavailable, Price=None
  J3 J4: MP=1755752
  J6: MP=1755749
Q1 Q2 Q3 Q4: library part CMP-32901-000143-1, "MOSFET N-CH 30V 161A DPAK", Continuous Drain Current=161A, Drain To Source Breakdown Voltage=30V, Drain To Source Resistance=3.2mΩ, Gate To Source Voltage=20V, Input Capacitace At Vds="4380pF @ 15V", Manufacturer=Infineon, Manufacturer Part Number=IRLR7843TRPBF, Max Forward Diode Voltage=1V, Max Junction Temp=+175°C, Package=PG-TO252-3, Power Dissipation=140W, Pulse Drain Current=620A, Temperature="-55°C to +175°C", Temperature Range Low=-55°C, Automotive=No, Category=Trans, ComponentLink2Description=Datasheet, ComponentLink2URL=https://www.infineon.com/dgdl/irlr7843pbf.pdf?fileId=5546d462533600a40153566de53526d8, Depletion Mode=False, Device Class L1="Discrete Semiconductors", Device Class L2=Transistors, Device Class L3=MOSFETs, Digikey Description="MOSFET N-CH 30V 161A DPAK", Drain To Source Voltage=30V, Footprint Url=https://www.infineon.com/cms/en/product/packages/PG-TO252/PG-TO252-3-901/, Gate Charge At Vgs="34nC @ 4.5V", Height=2.52mm, Lead Free=Yes, Number Of Channels=1, Number Of N Channels=1, Octopart=https://octopart.com/irlr7843trpbf-infineon-65875062, Reverse Recovery Charge=36nC, Reverse Recovery Time=39ns, RoHS=TRUE, Rthja Max=50°C/W, Temperature Range High=+175°C, Threshold Vgs Max=2.3V, Threshold Vgs Min=1.4V, Turn Off Delay Time=34ns, Turn On Delay Time=25ns
Q5: library part CMP-1048-00146-1, "Complementary Power Transistor, 3-Pin DPAK, Pb-Free, Tape and Reel", Manufacturer="On Semiconductor", ComponentLink1Description="Manufacturer URL", ComponentLink1URL=http://www.onsemi.com/, ComponentLink2Description=Datasheet, ComponentLink2URL=http://www.onsemi.cn/pub_link/Collateral/MJD2955-D.PDF, ComponentLink3Description="Package Specification", ComponentLink3URL=http://www.onsemi.cn/pub_link/Collateral/369C.PDF, DatasheetVersion="Rev. 13", fT Min (MHz)=2, IC Continuous (A)=10, Mounting Technology="Surface Mount", PackageDescription="3-Pin Flange Mount, Body 6.54 x 6.095 mm, Pitch 2.29 mm", PackageReference=DPAK-3-369C-01, PackageVersion="Rev. E, 02/2014", Packing="Tape and Reel", PartNumber=MJD3055T4G, Polarity=NPN, RoHS=TRUE
R21 R28 R52 R53: library part CMP-26527-002648-1, "Res Thick Film 2010 20mΩ 1% 1W ±250ppm/°C Molded SMD Plastic T/R", Case Code (Imperial)=2010, Case Code (Metric)=5025, Max Operating Temperature=155°C, Max Power Dissipation=1W, Min Operating Temperature=-55°C, Package Quantity=1, Resistance=20mR, Resistor Type="Thick Film", Temperature Coefficient=250ppm/°C, Tolerance=1%, Case/Package=2010, Contact Plating=Tin, Height=0.03inch, Lead Free="Lead Free", Length=0.197inch, Mount="Surface Mount", Number of Terminations=2, Packaging="Tape and Reel", Power Rating=1W, Radiation Hardening=No, RoHS Compliant=Yes, Series=CSRN, Size Code=2010, Width=0.097inch
R35 R36: library part CMP-2002-02518-1, Manufacturer="Vishay BCcomponents", Part Number=MCS04020D5600BE100
R45: library part CMP-03211-006861-1, "CRGP 0805 10K 1%", Ambient Temperature Range High=+70°C, Manufacturer=TE, Package=CRGP0805, Power Rating=0.33W, Resistance=10KΩ, Temperature="-55°C to +155°C", Temperature Coefficient=±100ppm/°C, Temperature Range High=+155°C, Temperature Range Low=-55°C, Tolerance=0.01, Voltage Rating=150V, Automotive=No, Category=Res, ComponentLink2Description=Datasheet, ComponentLink2URL=https://www.mouser.com/datasheet/2/418/NG_DS_9-1773463-9_A-1358566.pdf, Composition="Thick Film", Device Class L1="Passive Components", Device Class L2=Resistors, Device Class L3="Chip SMD Resistors", Digikey Description="CRGP 0805 10K 1%", Height=0.65mm, Ipc Land Pattern Name=RESC200125X55, Lead Free=Yes, Manufacturer Part Number=CRGP0805F10K, Octopart=https://octopart.com/crgp0805f10k-te+connectivity-91018782, RoHS=TRUE, Series=CRGP
T1 T2 T3: "Transformer", Manufacturer_Name=MYRRA, Datasheet Link=https://www.tme.com/Document/74b1c6fdfa5c80edd28be424718b4d1b/74080.pdf, Height=18mm, Manufacturer_Part_Number=74080
U1: library part CMP-09133-000023-1, "IC GATE DRVR LOW-SIDE 8MINISOIC", Case/Package=MSOP, Max Input Voltage=18V, Max Operating Temperature=125°C, Max Output current=4A, Max Supply Current=3mA, Min Input Voltage=4.5V, Min Operating Temperature=-40°C, Package Quantity=3000, Channel Type=Independent, Fall Time=25ns, Lead Free="Contains Lead", Max Supply Voltage=18V, Min Supply Voltage=4.5V, Mount="Surface Mount", Nominal Supply Current=3mA, Number of Drivers=2, Number of Outputs=2, Number of Pins=8, Output Current=4A, Packaging="Tape and Reel", Propagation Delay=35ns, Rise Time=14ns, RoHS Compliant=Yes, Series=-, Supply Current=3mA, Turn-On Delay Time=35ns
U2: library part CMP-0055-00630-3, "Low Power Dual Operational Amplifier, 8-pin Narrow SOIC", Manufacturer="Texas Instruments", Package Reference=D0008A, PackageTopMarking=NSZXTT*LM*358M, PowerWise=N, Code_IPC=SOIC127P600-8, Code_JEDEC=MS-012-AA, ComponentLink1Description="Datasheet URL", ComponentLink1URL=http://www.ti.com/general/docs/lit/getliterature.tsp?genericPartNumber=LM358-N&fileType=pdf, CompType=Amplifiers, PackageDescription="SOIC Narrow, 4.9 x 3.9 x 1.45mm, 8 Lead, 1.27mm Pitch", PinCount=8, RoHS=N
U3: library part CMP-00572-88252605-3, "5V Ultra Low Noise, Zero Drift Rail-to-Rail Precision Op Amp", Case/Package=SOT-23, Input Bias Current=120pA, Input Offset Voltage (Vos)=-200nV, Manufacturer Lifecycle Status=ACTIVE, Max Dual Supply Voltage=3V, Max Operating Temperature=125°C, Max Supply Voltage=6V, Min Dual Supply Voltage=1.125V, Min Operating Temperature=-40°C, Min Supply Voltage=2.25V, Nominal Supply Current=675µA, Output Current=65mA, Power Supply Rejection Ratio (PSRR)=135dB, Voltage Gain=174dB, Bandwidth=3.5MHz, Common Mode Rejection Ratio=135dB, ComponentLink1Description="Manufacturer's Website", ComponentLink1URL=http://www.renesas.com, ComponentLink2Description="Datasheet URL", ComponentLink2URL=https://octopart.com/cad-content/api/get-model-datasheet/15189/88252605, ComponentLink3Description="Manufacturer's Package Drawing", ComponentLink3URL=https://www.renesas.com/en/document/psc/package-drawing-sot23-5pin-p5064a, Contact Plating=Tin, Export Control Classification Number (ECCN) Code=EAR99, Gain Bandwidth Product=3.5MHz, Height=0m, HelpURL=https://octopart.com/cad-content/api/get-model-datasheet/15189/88252605, Lead Free="Lead Free", Length=2.9mm, Lifecycle Status=Production, Mount="Surface Mount", Number Of Channels=1, Number of Circuits=1, Number of Pins=5, Operating Supply Current=675µA, Output Current per Channel=65mA, Pitch=1mm, Radiation Hardening=No, Ram Size=384kB, RoHS=Compliant, Slew Rate=1.5V/µs, Supply Type="Dual, Single", Width=1.6mm
U4 U5: library part CMP-09139-000585-1, "IC REG CTRLR MULT TOPOLOGY 10DFN", Case/Package=DFN, Max Frequency=1MHz, Max Input Voltage=100V, Max Operating Temperature=125°C, Max Output current=1.2A, Max Output Voltage=12V, Min Input Voltage=5.5V, Min Operating Temperature=-40°C, Package Quantity=121, Height=0.7mm, Length=3mm, Max Supply Voltage=100V, Min Supply Voltage=5.5V, Mount="Surface Mount", Number of Outputs=1, Number of Pins=10, Output Voltage=100V, Packaging=Rail/Tube, REACH SVHC="No SVHC", RoHS Compliant=Yes, Series=-, Switching Frequency=1MHz, Topology=Boost, Width=3mm
U6: library part CMP-0244-00177-2, "IC REG LINEAR 5V 500MA DPAK", Case/Package=TO-252, Dropout Voltage=2V, Max Input Voltage=35V, Max Operating Temperature=125°C, Max Output current=500mA, Min Input Voltage=10V, Min Operating Temperature=-40°C, Min Output Voltage=5V, Output Voltage Accuracy=2%, Package Quantity=1, Power Supply Rejection Ratio (PSRR)=62dB, Quiescent Current=6mA, Tolerance=4%, Accuracy=2%, Contact Plating=Tin, Height=2.4mm, Lead Free="Lead Free", Length=6.6mm, Mount="Surface Mount", Nominal Output Voltage=5V, Number of Outputs=1, Number of Pins=3, Number of Regulators=1, Output Current=500mA, Output Type=Fixed, Output Voltage=5V, Packaging="Tape and Reel", Polarity=Positive, Radiation Hardening=No, REACH SVHC="No SVHC", Weight=0.01lb, Width=6.2mm
U7: library part CMP-209535-000001-1, "LDO Voltage Regulators 1A, 3.3V", Dropout Voltage=1.1V, Manufacturer="Advanced Monolithic Systems", Max Junction Temp=+125°C, Max Power Dissipation=1.2W, Max Supply Voltage=15V, Nominal Supply Current=5mA, Output Current=1A, Output Voltage=3.3V, Package=AMS1117, Temperature="-40°C to +125°C", Temperature Range Low=-40°C, Automotive=No, Category=IC, ComponentLink2Description=Datasheet, ComponentLink2URL=http://www.advanced-monolithic.com/pdf/ds1117.pdf, Device Class L1="Integrated Circuits (ICs)", Device Class L2="Power Management ICs", Device Class L3="Voltage Regulators - Linear", Height=1.8mm, Ipc Land Pattern Name=SOT229P700X180-4, Lead Free=Yes, Manufacturer Part Number=AMS1117-3.3, Number of Outputs=1, Octopart=https://octopart.com/ams1117-3.3-advanced+monolithic+systems-25899300, Output Type=Fixed, RoHS=TRUE, Standoff Height=0.64mm, Temperature Range High=+125°C
U8: library part CMP-0243-00165-1, "ARM Cortex-M4 32-bit MCU+FPU, 512 KB Flash, 128 KB RAM, 36 I/Os, 48-Pin UFQFPN, -40 to 85 degC, Tray", I/Os (High Current)=36, Operating Frequency(F) (Processor speed) (MHz)=100, Package Description=UFQFPN48, Package Reference="48-Pin Ultra Thin Fine Pitch Quad Flat No-Lead, 7 x 7 x 0.6 mm Body, 0.5 mm Pitch, Exposed Pad", Supply Voltage(Vcc) min (V)=1.7, ComponentLink1Description="Manufacturer URL", ComponentLink1URL=http://www.st.com/, ComponentLink2Description=Datasheet, ComponentLink2URL=http://www.st.com/st-web-ui/static/active/en/resource/technical/document/datasheet/DM00115249.pdf, Core="ARM Cortex-M4", DatasheetVersion="Rev. 6", FLASH Size (Prog) (kB)=512, Internal RAM Size (kB)=128, Mounting Technology="Surface Mount", Packing=Tray

## Free pads (board coordinates)
  round 1 smd: 4(62.484,79.883) 4(89.966,57.081) 4(104.706,62.815) 4(110.998,33.401) 4(111.71,38.423) 4(130.752,78.282) 5(73.914,43.18) 5(76.73,85.012) 5(115.062,89.408)
  rect 0.11x0.01 hole 3.4 unplated mask+0.05: 6(64.44,52.602)
  rect 0.11x0.01 hole 4.3 unplated mask+0.05: 6(64.516,126.873) 6(128.765,126.873) 6(129.286,41.021)

## Via types
v1: diameter 0.6, hole 0.3, Top to Bottom, 244 vias
v2: diameter 0.5, hole 0.2, Top to Bottom, 25 vias
v3: diameter 0.5, hole 0.3, Top to Bottom, 10 vias

## Nets (pads, with @x,y where several pads share a name; then routed paths per layer and width w, separated by ;. In a path a pad name is that pad's centre, name@x,y a point inside that pad or via, vN(x,y) a via of type N, cw(c..) or ccw(c..) an arc to the next point about the centre after c; other vN are vias at no path point)
1V65: C5.1 pad.4@89.966,57.081 R3.2 R10.1 R11.2 U3.1 | length 18.8
  Top w0.2: v1(89.789,58.801) 89.789,58.693 89.966,58.516 pad.4@89.966,57.081 91.854,55.193 v1(94.664,55.193)
  Bottom w0.2: C5.1@89.603,64.072 89.591,64.06 88.616,64.06 88.603,64.047 88.603,62.273 89.723,61.153 U3.1@89.723,60.268 89.723,58.867 v1(89.789,58.801) 89.897,58.801 90.151,59.055 91.948,59.055 92.656,59.763 R3.2@92.656,60.325
  Bottom w0.25: v1(94.664,55.193) 94.714,55.193 95.299,54.608 R11.2@95.299,54.558
3V3: C6.1 C7.1 C9.1 C10.1 C11.1 C14.1 C24.1 C25.2 C28.1 C29.1 C30.1 C38.1 C39.1 C44.1 J1.3 pad.4@104.706,62.815 R6.1 R33.2 R37.1 R38.1 U2.8 U3.5 U7.2 U7.4 U8.1 U8.9 U8.24 U8.36 U8.48 | length 152.9
  Top w0.4: v1(103.759,62.865) 103.784,62.84 104.681,62.84 pad.4@104.706,62.815
  Top w0.6: R33.2@87.355,78.391 87.53,78.216 87.53,77.316 v1(88.265,76.581)
  Power Plane w0.25: 93.571,71.628 93.594,71.628 ; 100.765,73.333 ccw(c100.588,73.51) 100.838,73.51
  Power Plane w0.3: v1(83.947,77.089) 87.712,77.089 v1@88.052,76.749
  Power Plane w0.4: v1(86.741,61.595) 89.789,61.595 v1(90.678,62.484) ; 93.594,71.628 99.06,71.628 100.765,73.333 ; v1(93.853,56.642) 100.545,56.642 ; 100.838,73.51 100.838,80.922 ; v3(101.219,81.407) 100.911,81.099 ; v1@102.689,62.865 v1(102.743,62.865) ; v1(103.759,62.865) 102.997,62.103 102.997,59.094 ; 100.545,56.642 ccw(c100.545,57.042) 100.828,56.759 ; 100.545,56.642 ccw(c100.545,57.042) 100.828,56.759 ; 100.828,56.759 102.88,58.811 ; 100.838,80.922 cw(c101.088,80.922) 100.911,81.099 ; 100.838,80.922 cw(c101.088,80.922) 100.911,81.099 ; 102.88,58.811 ccw(c102.597,59.094) 102.997,59.094 ; 102.88,58.811 ccw(c102.597,59.094) 102.997,59.094
  Power Plane w0.5: v1(91.682,81.218) 91.367,81.534 88.9,81.534 88.138,80.772 88.138,76.835 89.154,75.819 89.154,74.041 90.297,72.898 90.297,72.771 90.678,72.39 v3(92.837,72.39) ; 93.726,69.088 98.981,69.088 ccw(c98.981,69.588) 99.333,69.234 101.727,71.627 ccw(c101.373,71.98) 101.873,71.98 101.873,75.679 102.129,75.935 v1(102.129,75.962)
  Power Plane w0.6: v1(90.678,62.484) 92.456,62.484 ; v3(92.837,72.39) 93.551,71.676 ; v1@102.689,62.865 102.308,62.484 92.456,62.484 ; v1(107.315,62.865) 115.189,62.865 117.538,65.215 ; 117.729,65.405 117.729,77.089 v1(119.253,78.613) ; 92.456,62.484 93.551,63.579 ccw(c93.126,64.003) 93.726,64.003 93.726,69.088 93.726,71.252 ; 93.551,71.676 cw(c93.126,71.252) 93.594,71.628 cw(c93.126,71.252) 93.726,71.252 ; 93.551,71.676 cw(c93.126,71.252) 93.726,71.252
  Bottom w0.25: C39.1@93.561,73.114 94.151,73.704 U8.24@94.151,73.943 ; U8.48@99.651,80.743 U8.48@99.651,81.018 ; U8.9@100.301,76.093 101.199,76.093 101.219,76.073 101.733,76.073 v1@101.855,75.951 ; U8.1@100.301,80.093 101.356,80.093 C44.1@101.451,79.998
  Bottom w0.3: v1(83.947,77.089) 84.328,76.708 R38.1@84.328,75.565 ; v1(88.265,76.581) 88.322,76.524 88.322,75.635 R37.1@88.392,75.565 ; C11.1@92.222,80.733 92.541,80.733 92.541,80.687 92.964,80.264 93.105,80.264 93.276,80.093 U8.36@93.501,80.093 ; C7.1@92.895,57.199 C7.1@92.9,57.194 ; C14.1@92.9,56.303 C14.1@92.904,56.299
  Bottom w0.4: R6.1@86.395,60.909 86.445,60.909 86.545,61.009 86.545,61.059 86.703,61.216 86.703,61.557 v1(86.741,61.595) ; U3.5@89.723,62.668 90.494,62.668 v1(90.678,62.484) ; C10.1@91.221,80.722 C11.1@92.188,80.722 ; v3(92.837,72.39) 92.84,72.387 93.447,72.387 ; C38.1@93.421,71.91 93.447,71.936 93.447,72.387 ; C39.1@93.473,72.864 93.447,72.838 93.447,72.387 ; v1(93.853,56.642) U2.8@93.853,58.643
  Bottom w0.5: 91.679,80.733 v1(91.682,81.218) ; v1@102.175,75.962 C30.1@102.909,75.951 ; C30.1@102.851,75.89 C24.1@103.759,75.89 ; v1(119.253,78.613) J1.3@122.171,78.613
  Bottom w1: U7.2@100.464,62.865 v1(102.743,62.865) v1(103.759,62.865) U7.4@107.054,62.865 U7.4@107.052,62.863 ; C25.2@106.781,57.861 U7.4@106.781,62.181 ; U7.4@106.781,62.181 cw(c107.781,62.178) U7.4@107.052,62.863 ; U7.4@106.781,62.181 cw(c107.781,62.178) U7.4@107.052,62.863